# Altium PCB PCB1.PcbDoc
Units mm, origin at the board's own origin, x right, y up, seen from the top; angles counter-clockwise.
Board outline 32.64 x 22.86 mm, 2 copper layers (Top Layer, Bottom Layer); 8 components, 7 nets, 25 pads, 0 vias.
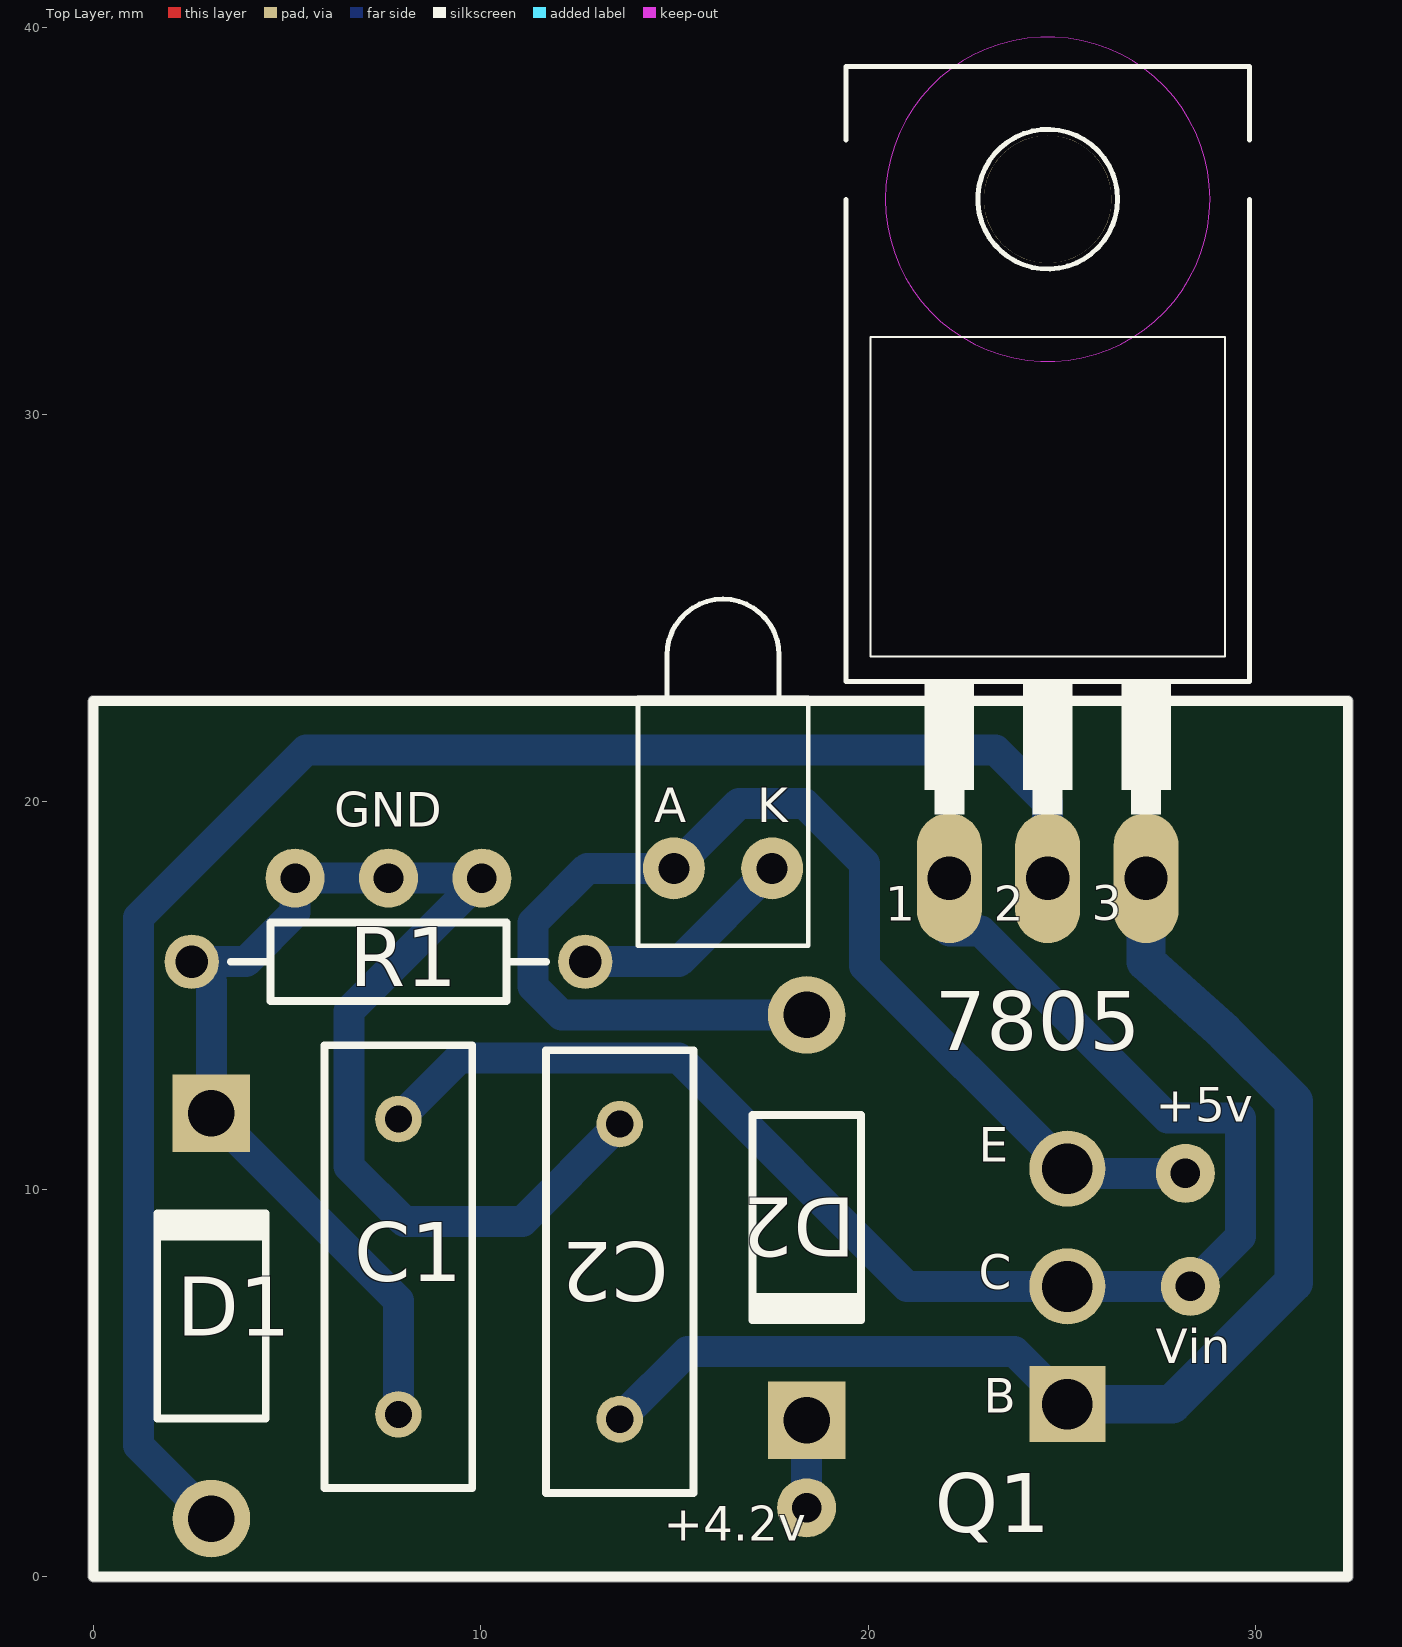
[diagram p0: Top Layer view]
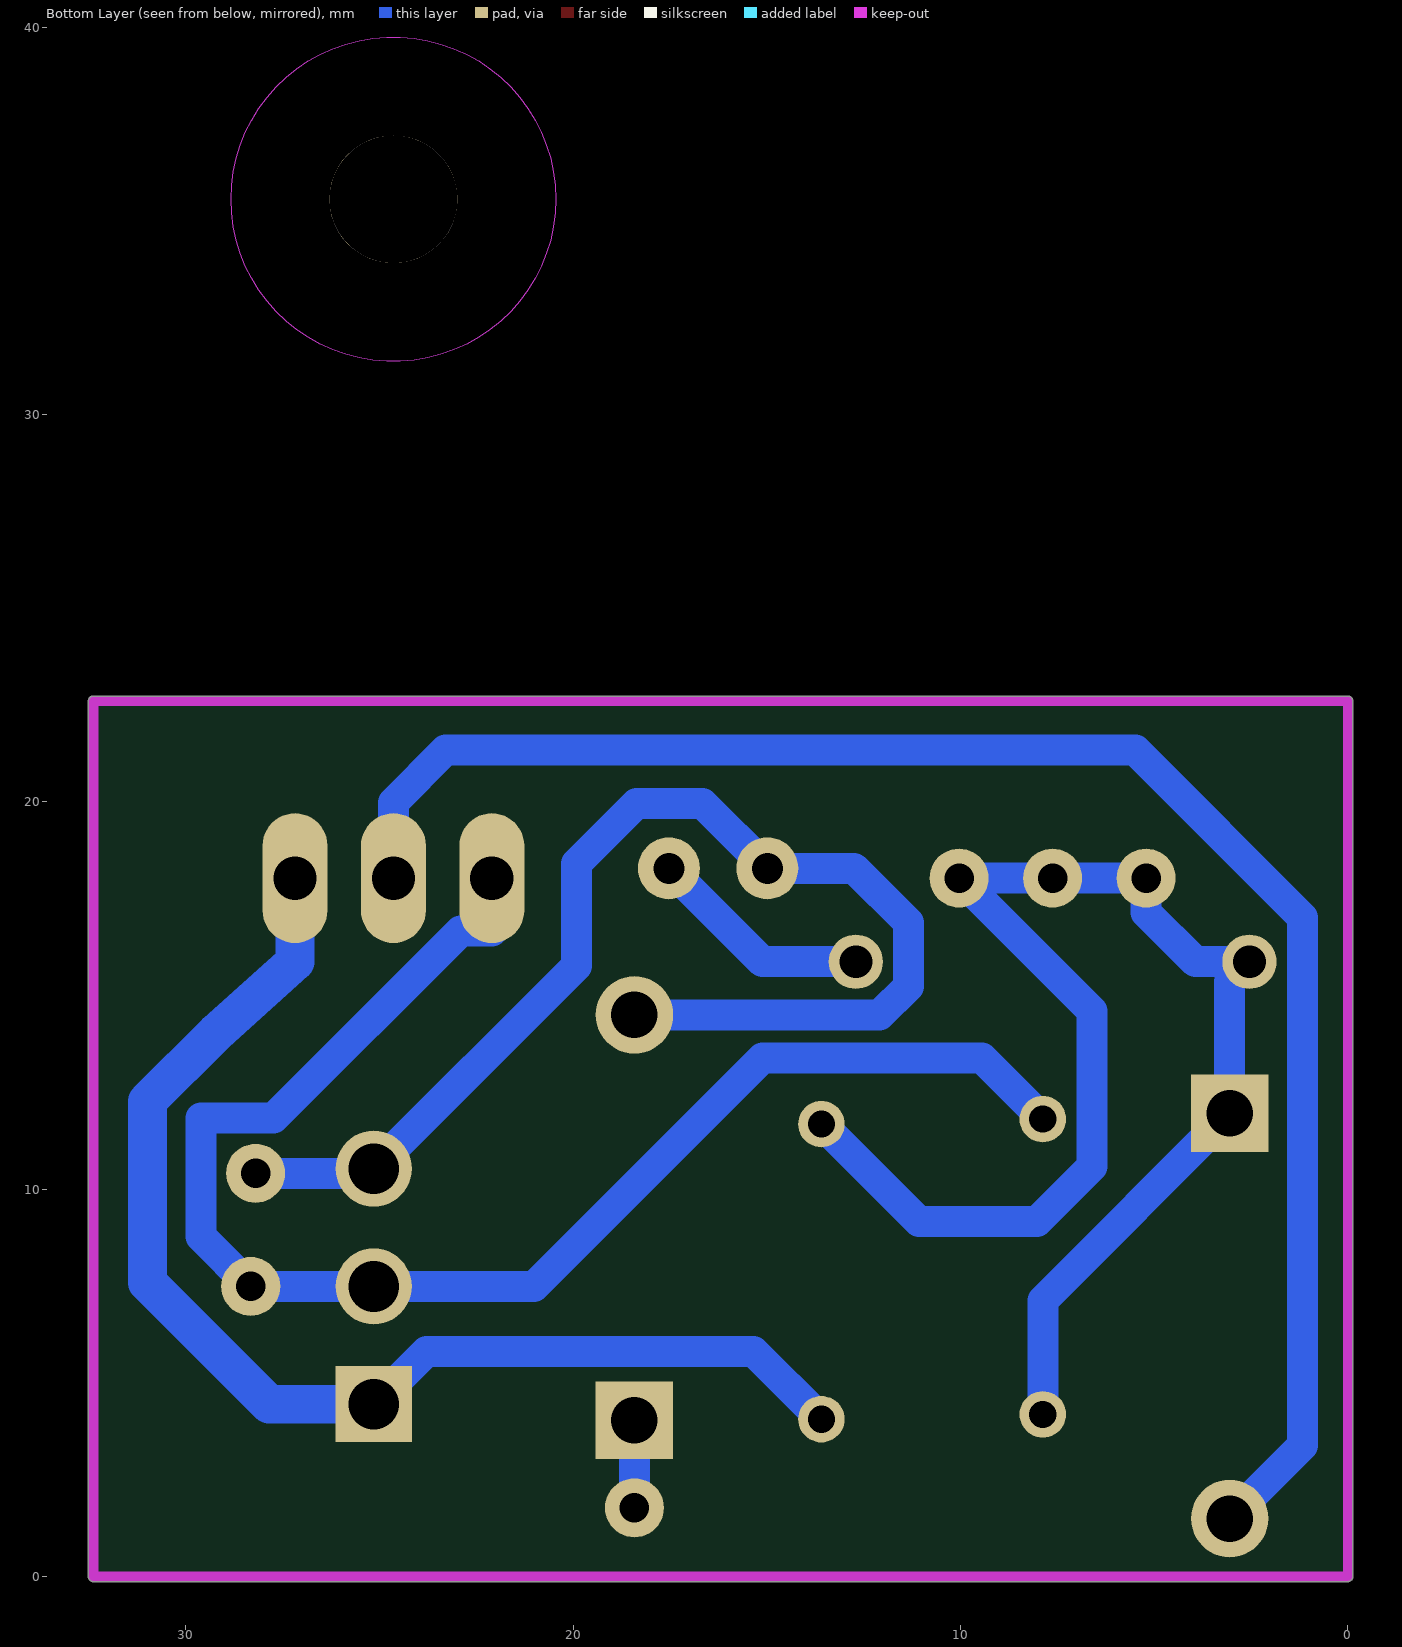
[diagram p1: Bottom Layer view, seen from below]

## Layer stack, top to bottom
Top Solder: solder mask 0.0102, Solder Resist, Dk 3.5
Top Layer: signal copper 0.0356
Dielectric 1: dielectric 0.32, FR-4, Dk 4.8
Bottom Layer: signal copper 0.0356
Bottom Solder: solder mask 0.0102, Solder Resist, Dk 3.5

## Board outline
0,-0.127 cw(c0,0) -0.127,0 -0.127,22.606 cw(c0,22.606) 0,22.733 32.385,22.733 cw(c32.385,22.606) 32.512,22.606 32.512,0 cw(c32.385,0) 32.385,-0.127

## Design rules (kind name [scope] priority, off if disabled: settings)
Clearance [All] p1: gap=0.254 ignorepadtopadclearanceinfootprint=FALSE except(0: Arc-Hole Track-Hole SMDPad-Hole THPad-Hole Via-Hole Fill-Hole Poly-Hole Region-Hole Text-Hole)
PolygonConnect [All] p1: connectstyle=Relief reliefconductorwidth=0.254 reliefentries=4 polygonreliefangle="90 Angle" airgapwidth=0.254
RoutingLayers [All] p1: top layer_v5=FALSE bottom layer_v5=TRUE
RoutingVias [All] p1: holewidth=0.711 width=1.27 viastyle="Through Hole" minholewidth=0.711 minwidth=1.27 maxholewidth=0.711 maxwidth=1.27
SolderMaskExpansion [All] p1: expansion=0.102 istentingtop=FALSE
Width [All] p1: maxlimit=1 minlimit=1 preferedwidth=1 minimp=50.000000 maximp=50.000000 favimp=50.000000
29 further rules are at their usual default settings.

## Components (designator, comment, footprint, x,y, rotation, side; value= is the part's Value field where it differs from the comment)
7805 "LM7805" TO220 24.638,24.384 r0 top
C1 "Cap" RAD-0.3 7.874,8.001 r90 top value=0.33uF
C2 "Cap" RAD-0.3 13.589,7.874 r270 top value=0.1uf
D1 "Diode 1N4007" DO-41 3.048,6.731 r90 top
D2 "Diode 1N4007" DO-41 18.415,9.271 r270 top
Q1 "" TO304P498X1010X2089-3P 25.146,4.453 r90 top
R1 "Res2" AXIAL-0.4 7.62,15.875 r0 top value=100
? "LED1" LED-1 16.256,18.288 r90 top

## Footprints (in the part's own frame and the unit in brackets; to place one, negate y for a bottom-side part, rotate by r counter-clockwise, add the part's x,y. Pads: shape width x height; smd on the part's side, far side on the other; paste and mask are expansions set on the pad)
AXIAL-0.4 [mm] "Axial Device, Thru-Hole; 2 Leads; 0.4 in Pin Spacing"
  round 1.4 hole 0.85: 1(-5.08,0) 2(5.08,0)
  silkscreen extent -4.06,-1.02 4.06,1.02
DO-41 [mm] "Diode, Axial; Body 5.2 x 2.7 mm (LxDia. max), Lead Dia. 0.86 mm (max)"
  round 2 hole 1.2: 1(-5.23,0)
  rect 2x2 hole 1.2: 2(5.23,0)
  silkscreen extent -2.65,-1.4 2.75,1.4
LED-1 [mm] "LED; 2 Leads"
  round 1.6 hole 0.8: 1(0,1.27) 2(0,-1.27)
  silkscreen extent -2,-2.2 6.95,2.2
RAD-0.3 [mm] "Radial Cap, Thru-Hole; 2 Leads; 0.3 in Pin Spacing"
  round 1.2 hole 0.7: 1(-3.81,0) 2(3.81,0)
  silkscreen extent -5.71,-1.91 5.71,1.91
TO220 [mil]
  oval 66x132 hole 44: 1(-100,-250) 2(0,-250) 3(100,-250)
  round 130 hole 130 unplated: ""(0,440)
  Keep-Out Layer circle w0: c0,440 r165
  Keep-Out Layer circle w0: c0,440 r165
  silkscreen extent -205,-185 205,575
TO304P498X1010X2089-3P [mm]
  rect 1.965x1.965 / inner round 1.815 / far side rect 1.965x1.965 hole 1.31: 1(0,0)
  round 1.965 hole 1.31: 2(3.04,0) 3(6.08,0)

## Part data
7805: Package=None, Availability=Unavailable, MP=LM7805, Price=None
C1 C2: "Capacitor", LatestRevisionDate=17-Jul-2002, LatestRevisionNote="Re-released for DXP Platform.", PackageDescription="Radial Cap, Thru-Hole; 2 Leads; 0.3 in Pin Spacing", PackageReference=RAD-0.3, Published=8-Jun-2000, Publisher="Altium Limited"
D1 D2: "1 Amp General Purpose Rectifier", Code_JEDEC=DO-204-AL, ComponentLink1Description="Manufacturer Link", ComponentLink1URL=http://www.fairchildsemi.com/, ComponentLink2Description=Datasheet, ComponentLink2URL=http://www.fairchildsemi.com/ds/1N%2F1N4001.pdf, DatasheetVersion=1998, LatestRevisionDate=17-Jul-2002, LatestRevisionNote="Re-released for DXP Platform.", PackageDescription="Diode, Axial; Body 5.2 x 2.7 mm (LxDia. max), Lead Dia. 0.86 mm (max)", PackageReference=DO-41, PackageVersion=Aug-1999, Published=8-Jun-2000, Publisher="Altium Limited"
Q1: library part 2SD313, Manufacturer_Name=MOSPEC, Package=TO304P498X1010X2089-3P, DeviceSetName=2SD313, GateName_1=G$1, Height=4.98mm, LibraryName=2SD313, Manufacturer_Part_Number=2SD313, SymbolName_1=2SD313
R1: "Resistor", LatestRevisionDate=17-Jul-2002, LatestRevisionNote="Re-released for DXP Platform.", PackageDescription="Axial Device, Thru-Hole; 2 Leads; 0.4 in Pin Spacing", PackageReference=AXIAL-0.4, Published=8-Jun-2000, Publisher="Altium Limited"
?: "Typical RED GaAs LED", LatestRevisionDate=08-Jul-2005, LatestRevisionNote="Mech Layer 1 removed.", PackageDescription="LED; 2 Leads", PackageReference=LED-1, Published=8-Jun-2000, Publisher="Altium Limited"

## Free pads (board coordinates)
  round 1.524 hole 0.762: 2(28.194,10.414) 3(28.321,7.493) 4(18.415,1.778) 5(5.207,18.034) 6(7.62,18.034) 7(10.033,18.034)

## Nets (pads, with @x,y where several pads share a name; then routed paths per layer and width w, separated by ;. In a path a pad name is that pad's centre, name@x,y a point inside that pad or via, vN(x,y) a via of type N, cw(c..) or ccw(c..) an arc to the next point about the centre after c; other vN are vias at no path point)
+4.2v: D2.2 pad.4 | length 2.3
  Bottom Layer w0.8: pad.4 D2.2
GND: C1.1 C2.1 D1.2 pad.5 pad.6 pad.7 R1.1 | length 40.3
  Bottom Layer w0.8: C1.1 7.874,7.135 D1.2 3.048,15.367 R1.1 3.937,15.875 5.207,17.145 pad.5 pad.6 pad.7 6.604,14.605 6.604,10.592 8.026,9.169 11.074,9.169 C2.1
Net7805_2: 7805.2 D1.1 | length 44.1
  Bottom Layer w0.8: D1.1 1.168,3.381 1.168,17.018 5.486,21.336 23.292,21.336 24.638,19.99 7805.2
Net7805_3: 7805.3 C2.2 Q1.1 | length 32.1
  Bottom Layer w0.8: C2.2 15.342,5.817 23.782,5.817 Q1.1
  Bottom Layer w1: Q1.1 27.846,4.453 30.988,7.595 30.988,12.268 29.21,14.046 27.178,15.875 7805.3
Net_1: ?.1 D2.1 pad.2 Q1.3 | length 32.7
  Bottom Layer w0.8: D2.1 12.085,14.501 11.346,15.24 11.346,16.883 12.751,18.288 ?.1 16.662,19.964 18.364,19.964 19.914,18.415 19.914,15.765 Q1.3 25.73,10.533 25.73,10.414 pad.2
Net_2: ?.2 R1.2 | length 5.8
  Bottom Layer w0.8: R1.2 15.113,15.875 ?.2
Vin: 7805.1 C1.2 pad.3 Q1.2 | length 39.3
  Bottom Layer w0.8: C1.2 9.449,13.386 15.113,13.386 21.006,7.493 Q1.2 pad.3 29.61,8.782 29.61,11.836 27.737,11.836 22.911,16.662 22.098,16.662 7805.1
pads on no net: 7805.

## Keep-outs
Bottom Layer:
  lines w0.254: 0,0 32.385,0 32.385,22.606 0,22.606 0,0

## Silkscreen, mask and mechanical layers (free items; w line width, h text height)
Top Overlay:
  lines w0.254: 0,0 32.385,0 32.385,22.606 0,22.606 0,0
  text "A" at 14.478,19.177 h1.52
  text "K" at 17.145,19.177 h1.52
  text "GND" at 6.223,19.067 h1.52
  text "3" at 25.781,16.654 h1.52
  text "1" at 20.447,16.637 h1.52
  text "2" at 23.24,16.637 h1.52
  text "+5v" at 27.432,11.447 h1.52
  text "E" at 22.86,10.414 h1.52
  text "C" at 22.86,7.129 h1.52
  text "Vin" at 27.433,5.207 h1.52
  text "B" at 22.987,3.937 h1.52
  text "+4.2v" at 14.732,0.635 h1.52

## Text inside footprints (layer, text, board x,y; h text height)
7805: Mechanical 13 "1" at 21.457,24.384 h1.27; Mechanical 13 "2" at 24.002,24.384 h1.27; Mechanical 13 "3" at 26.543,24.384 h1.27